# Altium PCB driver_control.PcbDoc
Units mm, origin at the board's own origin, x right, y up, seen from the top; angles counter-clockwise.
Board outline 95 x 62.6 mm, 2 copper layers (Top Layer, Bottom Layer); 60 components, 55 nets, 275 pads, 163 vias.
Unrouted connection lines stored in the file: 8.
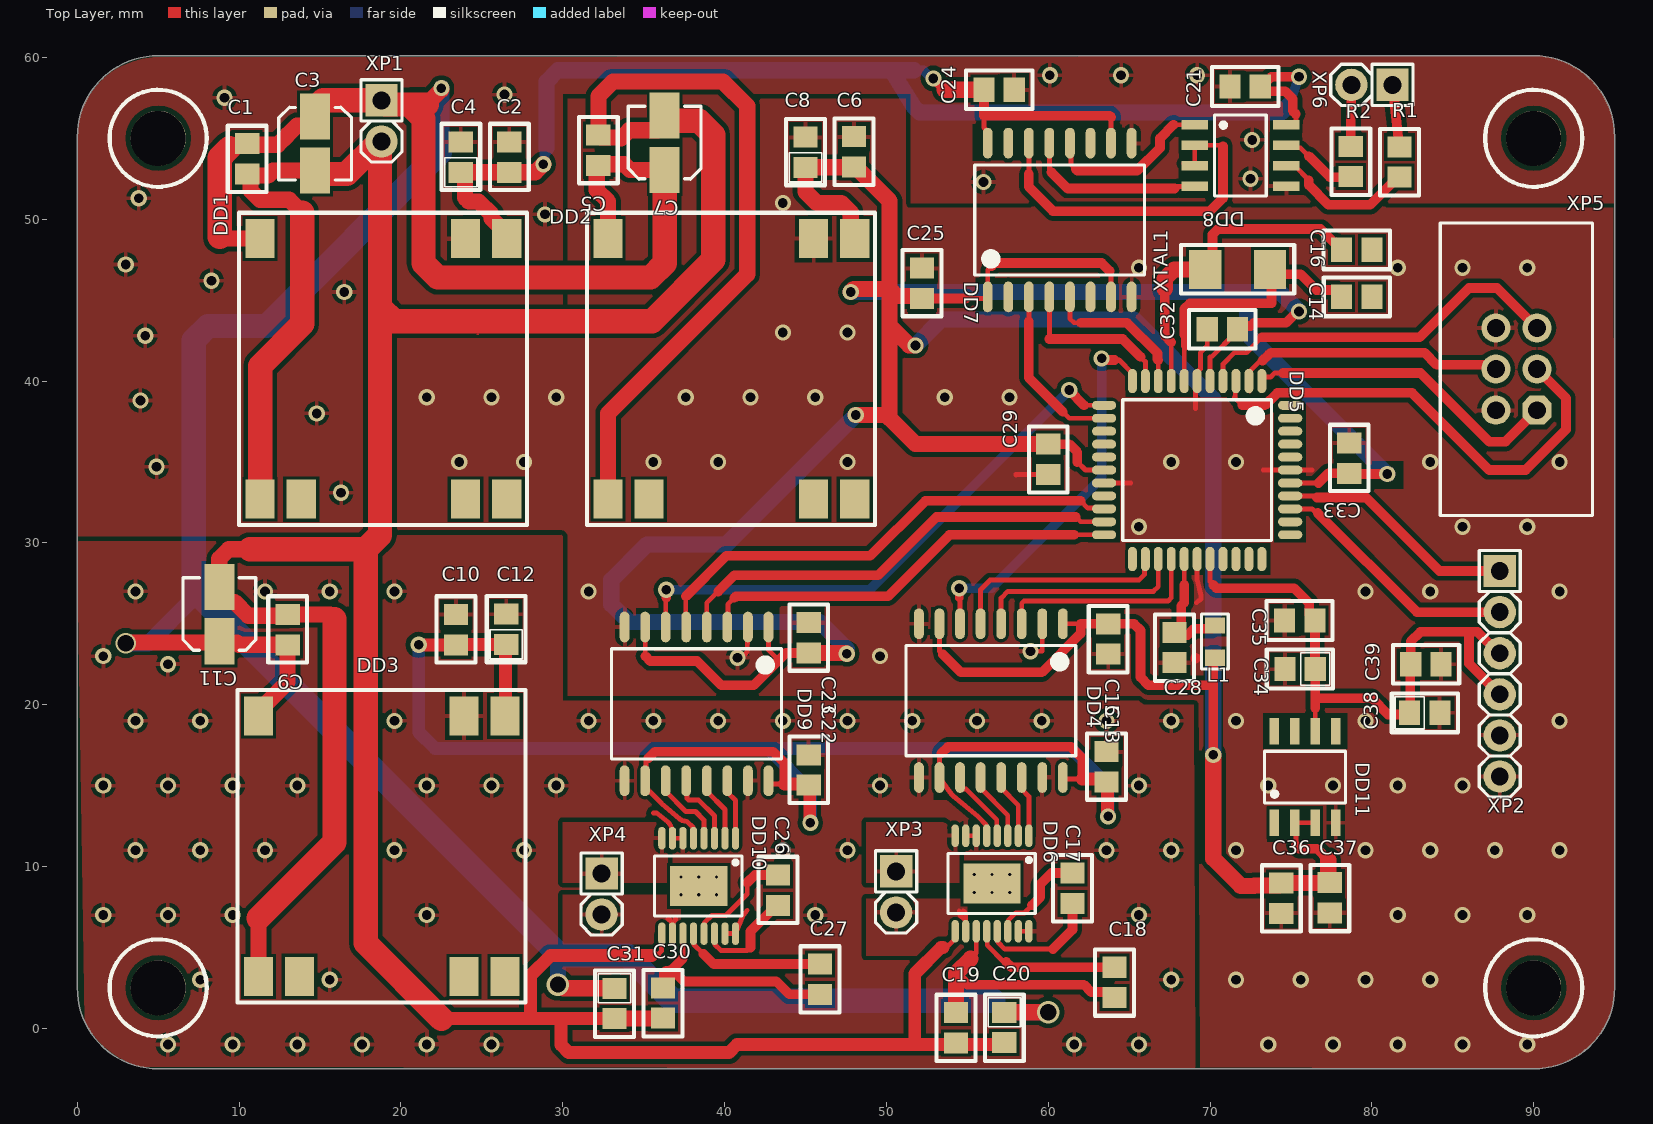
[diagram p0: Top Layer view]
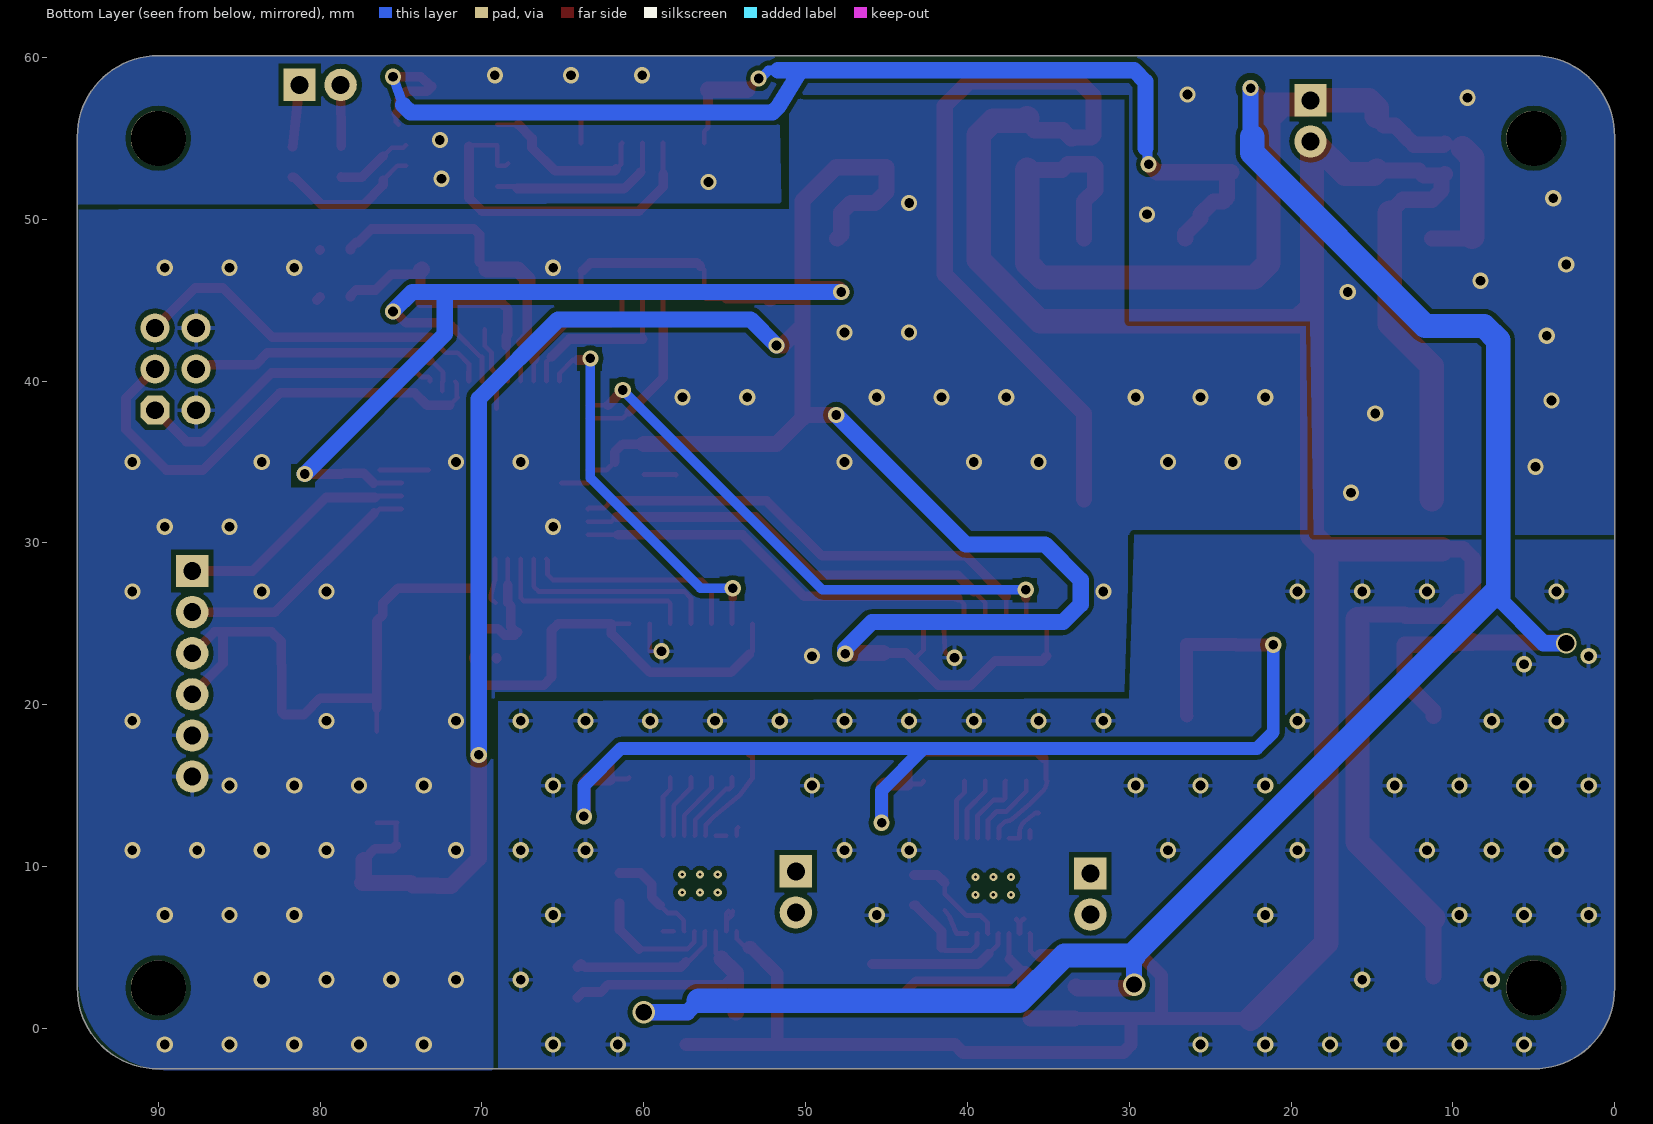
[diagram p1: Bottom Layer view, seen from below]

## Layer stack, top to bottom
Top Solder: solder mask 0.0102, Solder Resist, Dk 3.5
Top Layer: signal copper 0.0356
Dielectric 1: dielectric 0.32, FR-4, Dk 4.8
Bottom Layer: signal copper 0.0356
Bottom Solder: solder mask 0.0102, Solder Resist, Dk 3.5

## Board outline
0,2.5 0,55.1 cw(c5,55.1) 5,60.1 4.9,60.1 89.9,60.1 90,60.1 cw(c90,55.1) 95,55.1 95,2.4 95,2.5 cw(c90,2.5) 90,-2.5 90.1,-2.5 5,-2.5 cw(c5,2.5)

## Design rules (kind name [scope] priority, off if disabled: settings)
Clearance [All] p1: gap=0.3 ignorepadtopadclearanceinfootprint=FALSE except(0.2: Arc-SMDPad Track-SMDPad SMDPad-SMDPad SMDPad-THPad SMDPad-Via SMDPad-Fill SMDPad-Poly SMDPad-Region SMDPad-Text SMDPad-Hole)
HoleSize [All] p1: absolutevalues=TRUE maxlimit=5 minlimit=0.5 maxpercent=80.000 minpercent=20.000
HoleToHoleClearance [All] p1: gap=0.3 allowstackedmicrovias=TRUE
PolygonConnect [All] p1: connectstyle=Relief reliefconductorwidth=0.254 reliefentries=4 polygonreliefangle="90 Angle" airgapwidth=0.254
RoutingVias [All] p1: holewidth=0.6 width=1 viastyle="Through Hole" minholewidth=0.6 minwidth=1 maxholewidth=0.6 maxwidth=1
ShortCircuit [All] p1: allowed=TRUE
SilkToSilkClearance [All] p1: silktosilkclearance=0.2
SilkToSolderMaskClearance [IsPad] p1: minsilkscreentomaskgap=0.2 clearancetoexposedcopper=TRUE
SolderMaskExpansion [All] p1: expansion=0.102 istentingtop=FALSE
Width [All] p1: maxlimit=4 minlimit=0.2 preferedwidth=0.3
25 further rules are at their usual default settings.

## Components (designator, comment, footprint, x,y, rotation, side; value= is the part's Value field where it differs from the comment)
C1 "0.1мкФ" Capacitor_0805 10.5,54.675 r270 top
C2 "0.1мкФ" Capacitor_0805 26.7,52.9 r90 top
C3 "100мкФ" CAPAE4643X46M 14.7,56.35 r270 top
C4 "10мкФ" Capacitor_tant_0805 23.7,52.9 r90 top
C5 "0.1мкФ" Capacitor_0805 32.2,53.325 r90 top
C6 "0.1мкФ" Capacitor_0805 48,53.225 r90 top
C7 "100мкФ" CAPAE4643X46M 36.3,53.05 r90 top
C8 "10мкФ" Capacitor_tant_0805 45,53.2 r90 top
C9 "0.1мкФ" Capacitor_0805 13,23.7 r90 top
C10 "0.1мкФ" Capacitor_0805 23.4,23.7 r90 top
C11 "100мкФ" CAPAE4643X46M 8.783,23.92 r90 top
C12 "10мкФ" Capacitor_tant_0805 26.5,23.725 r90 top
C13 "0.1мкФ" Capacitor_0805 63.6,15.225 r90 top
C14 "22пкФ" Capacitor_0805 78.125,45.2 r0 top
C15 "0.1мкФ" Capacitor_0805 63.7,25 r270 top
C16 "22пкФ" Capacitor_0805 78.118,48.11 r0 top
C17 "22пкФ" Capacitor_0805 61.5,9.6 r270 top
C18 "0.1мкФ" Capacitor_0805 64.1,3.775 r270 top
C19 "0.1мкФ" Capacitor_0805 54.3,0.975 r270 top
C20 "1мкФ" Capacitor_tant_0805 57.288,0.987 r270 top
C21 "0.1мкФ" Capacitor_0805 71.225,58.2 r0 top
C22 "0.1мкФ" Capacitor_0805 45.2,15.025 r90 top
C23 "0.1мкФ" Capacitor_0805 45.2,23.2 r90 top
C24 "0.1мкФ" Capacitor_0805 56.025,58 r0 top
C25 "0.1мкФ" Capacitor_0805 52.2,45.1 r90 top
C26 "22пкФ" Capacitor_0805 43.3,7.6 r90 top
C27 "0.1мкФ" Capacitor_0805 45.9,3.975 r270 top
C28 "0.1мкФ" Capacitor_0805 67.8,24.475 r270 top
C29 "0.1мкФ" Capacitor_0805 60,36.1 r270 top
C30 "0.1мкФ" Capacitor_0805 36.2,2.5 r270 top
C31 "1мкФ" Capacitor_tant_0805 33.2,2.475 r270 top
C32 "0.1мкФ" Capacitor_0805 71.7,43.2 r180 top
C33 "0.1мкФ" Capacitor_0805 78.6,34.3 r90 top
C34 "1мкФ" Capacitor_tant_0805 76.5,22.2 r180 top
C35 "0.1мкФ" Capacitor_0805 76.475,25.2 r180 top
C36 "10мкФ" Capacitor_0805 74.4,8.975 r270 top
C37 "0.1мкФ" Capacitor_0805 77.4,9 r270 top
C38 "1мкФ" Capacitor_tant_0805 82.325,19.5 r0 top
C39 "0.1мкФ" Capacitor_0805 82.4,22.5 r0 top
DD1 "TMR-1-2411SM" TMR1SM_SMD 11.3,32.7 r270 top
DD2 "TDR-2-2411SM" TMR1SM_SMD 32.8,32.7 r270 top
DD3 "TMR-1-2411SM" TMR1SM_SMD 11.2,3.2 r270 top
DD4 "ADuM1401" ADUM_SOIC 60.9,25 r270 top
DD5 "ATMEGA16-8UA" ATMEGA16-44A 73.2,40 r270 top
DD6 "DRV8874" DRV8874_TSOP127P600-8N 58.8,11.9 r270 top
DD7 "ADuM1301" ADUM_SOIC 56.26,45.2 r90 top
DD8 "ADM485" "SOIC_N8 (REF198, ADM485)" 69.05,55.84 r0 top
DD9 "ADuM1401" ADUM_SOIC 42.71,24.8 r270 top
DD10 "DRV8874" DRV8874_TSOP127P600-8N 40.675,11.75 r270 top
DD11 "REF198" "SOIC_N8 (REF198, ADM485)" 73.96,12.7 r90 top
L1 "Fixed inductor, 10мкГн, ±20%, 0805, 100mA, -55...+125°C" "IND: 0805" 70.3,23.9 r90 top value=10мкГн
R1 "120 Ом" resistor_0805 81.7,54.475 r270 top
R2 "120 Ом" resistor_0805 78.7,54.5 r270 top
XP1 "PLS-2" "CON: PLS-2" 18.796,56.074 r270 top
XP2 "Connector, 6pin, 2.54mm, 500VAC, 3A" "CON: PLS-6" 87.9,21.91 r270 top
XP3 "PLS-2" "CON: PLS-2" 50.6,8.43 r270 top
XP4 "PLS-2" "CON: PLS-2" 32.4,8.3 r270 top
XP5 "Connector, 6pin, 2.54mm, 500VAC, 3A" "CON: IDC-6MS" 88.93,40.74 r90 top
XP6 "PLS-2" "CON: PLS-2" 80,58.3 r180 top
XTAL1 "8Мгц" Z_0503 69.7,46.9 r0 top

## Footprints (in the part's own frame and the unit in brackets; to place one, negate y for a bottom-side part, rotate by r counter-clockwise, add the part's x,y. Pads: shape width x height; smd on the part's side, far side on the other; paste and mask are expansions set on the pad)
ADUM_SOIC [mm]
  oval 1.9x0.6 smd: 1(0,0) 2(0,-1.27) 3(0,-2.54) 4(0,-3.81) 5(0,-5.08) 6(0,-6.35) 7(0,-7.62) 8(0,-8.89) 9(9.5,-8.89) 10(9.5,-7.62) 11(9.5,-6.35) 12(9.5,-5.08) 13(9.5,-3.81) 14(9.5,-2.54) 15(9.5,-1.27) 16(9.5,0)
  silkscreen extent 1.35,-9.69 8.15,0.8
ATMEGA16-44A [mm]
  oval 1.5x0.55 smd: 1(0,0) 2(0,-0.8) 3(0,-1.6) 4(0,-2.4) 5(0,-3.2) 6(0,-4) 7(0,-4.8) 8(0,-5.6) 9(0,-6.4) 10(0,-7.2) 11(0,-8) 23(11,-8) 24(11,-7.2) 25(11,-6.4) 26(11,-5.6) 27(11,-4.8) 28(11,-4) 29(11,-3.2) 30(11,-2.4) 31(11,-1.6) 32(11,-0.8) 33(11,0)
  oval 0.55x1.5 smd: 12(1.5,-9.75) 13(2.3,-9.75) 14(3.1,-9.75) 15(3.9,-9.75) 16(4.7,-9.75) 17(5.5,-9.75) 18(6.3,-9.75) 19(7.1,-9.75) 20(7.9,-9.75) 21(8.7,-9.75) 22(9.5,-9.75) 34(9.5,1.75) 35(8.7,1.75) 36(7.9,1.75) 37(7.1,1.75) 38(6.3,1.75) 39(5.5,1.75) 40(4.7,1.75) 41(3.9,1.75) 42(3.1,1.75) 43(2.3,1.75) 44(1.5,1.75)
  silkscreen extent 1.15,-8.6 9.85,0.6, body extent 1.15,-8.6 9.85,0.6, height 1.2
Capacitor_0805 [mm]
  rect 1.3x1.5 smd: 1(0,0) 2(1.875,0)
  silkscreen extent -1.1,-1.2 3,1.2
Capacitor_tant_0805 [mm]
  rect 1.3x1.5 smd: 1(0,0) 2(1.875,0)
  silkscreen extent -1.1,-1.2 3,1.2
CAPAE4643X46M [mm] "Aluminum Electrolytic Capacitor, Body 4,30x4,30x4,60mm, IPC Low Density"
  rect 2.85x1.85 smd: 1(0,0) 2(3.35,0)
  silkscreen extent -0.57,-2.25 3.93,2.25
"CON: IDC-6MS" [mm] "IDC-6MS 6 pin PCB-mount connector"
  oct 1.8x1.8 hole 1.1: 1(-2.54,-1.27)
  round 1.8 hole 1.1: 2(-2.54,1.27) 3(0,-1.27) 4(0,1.27) 5(2.54,-1.27) 6(2.54,1.27)
  round 0.5 on Top Overlay: ""(-9.6,-4.5)
  round 0.5 on Mech1: ""(-8.4,-4)
  silkscreen extent -9.05,-4.7 9.03,4.7, body extent -8.89,-4.55 8.87,4.55, height 9
"CON: PLS-2" [mm]
  rect 2x2 hole 1.1: 1(-1.27,0)
  round 2 hole 1.1: 2(1.27,0)
  silkscreen extent -2.54,-1.27 2.54,1.27, body extent -2.57,-1.28 2.51,1.26, height 8.54
"CON: PLS-6" [mm]
  rect 2x2 hole 1.1: 1(-6.35,0)
  round 2 hole 1.1: 2(-3.81,0) 3(-1.27,0) 4(1.27,0) 5(3.81,0) 6(6.35,0)
  silkscreen extent -7.62,-1.27 7.62,1.27, body extent -7.62,-1.27 7.62,1.27, height 8.54
DRV8874_TSOP127P600-8N [mm]
  oval 1.4x0.45 smd: 1(0,0) 2(0,-0.65) 3(0,-1.3) 4(0,-1.95) 5(0,-2.6) 6(0,-3.25) 7(0,-3.9) 8(0,-4.55) 9(5.9,-4.55) 10(5.9,-3.9) 11(5.9,-3.25) 12(5.9,-2.6) 13(5.9,-1.95) 14(5.9,-1.3) 15(5.9,-0.65) 16(5.9,0)
  rect 2.46x3.55 smd: 17(2.95,-2.275)
  silkscreen extent 1.1,-5 4.8,0.4
"IND: 0805" [mm]
  rect 1x1.25 smd: 1(-1,0) 2(1,0)
  silkscreen extent -1.7,-0.82 1.7,0.82, body extent -1,-0.62 1,0.63, height 0.85
resistor_0805 [mm] "ЧИП-резистор типоразмера 0805"
  rect 1.3x1.5 smd: 0(0,0) 1(1.875,0)
  silkscreen extent -1.1,-1.2 3,1.2
"SOIC_N8 (REF198, ADM485)" [mm] "SOIC, 8-Leads, Body 4,90x3,90mm, Pitch 1,27mm, IPC Medium Density"
  rect 1.65x0.6 smd: 1(0,0) 2(0,-1.27) 3(0,-2.54) 4(0,-3.81) 5(5.65,-3.81) 6(5.65,-2.54) 7(5.65,-1.27) 8(5.65,0)
  silkscreen extent 1.22,-4.41 4.43,0.6
TMR1SM_SMD [mm]
  rect 2.4x1.8 smd: 1(0,0) 2(0,2.54) 6(0,12.7) 7(0,15.24) 8(-16.1,15.24) 9(-16.1,12.7) 14(-16.1,0)
  silkscreen extent -17.7,-1.3 1.6,16.5
Z_0503 [mm]
  rect 2x2.4 smd: 1(0,0) 2(4,0)
  silkscreen extent -1.5,-1.5 5.5,1.5

## Part data
C1 C2 C5 C6 C9 C10 C13 C14 C15 C16 C17 C18 C19 C21 C22 C23 C24 C25 C26 C27 C28 C29 C30 C32 C33 C35 C36 C37 C39: library part Capacity_0805
C3 C7 C11: library part Capacity_electrolity_polar_0805, "electrolity capacitor", link=https://www.digikey.com/en/products/detail/taiyo-yuden/JMK212BJ106KD-T/930656
C4 C8 C12 C20 C31 C34 C38: library part Capacity_tantal_0805, "tanral capacitor"
DD5: library part ATMEGA16-44A
L1: library part Inductor_0805, Manufacturer="Murata Electronics", MaxCurrent=100mA, Package=0805, PartNumber=LQM21FN100M70L, Temperature=-55...+125°C, Tolerance=±20%, TypeInductor="Fixed inductor", HelpURL=https://www.digikey.com/product-detail/en/murata-electronics-north-america/LQM21FN100M70L/490-4029-1-ND/1016289, ValueManufacturerPartNumber="Fixed inductor, 10мкГн, ±20%, 0805, 100mA, -55...+125°C"
R1 R2: library part Resistor_0805
XP1 XP6: "https://www.chipdip.ru/product/wf-2r"
XP2: library part PLS-6, CurrentMax=3A, Manufacturer=Connfly, VoltageMax=500VAC, CommentText=PLS-6, HelpURL=https://www.chipdip.ru/product/pls-6, Multichannel=6pin, PartNumber=PLS-6, Pitch=2.54mm, TypeConnector=Connector, ValueManufacturerPartNumber="Connector, 6pin, 2.54mm, 500VAC, 3A"
XP3 XP4: library part PLS-2-1
XP5: library part IDC-6, CurrentMax=3A, Manufacturer=Connfly, PartNumber=PLS-6, VoltageMax=500VAC, CommentText="\"Разъем\"", HelpURL=https://www.chipdip.ru/product/pls-6, Multichannel=6pin, Pitch=2.54mm, TypeConnector=Connector, ValueManufacturerPartNumber="Connector, 6pin, 2.54mm, 500VAC, 3A"
XTAL1: library part resonstor

## Free pads (board coordinates)
  round 3.4 hole 3.4 unplated: 5(5,55) 5(5,2.5) 5(90,2.5) 5(90,55)

## Via types
v1: diameter 1, hole 0.6, Top Layer to Bottom Layer, 148 vias
v2: diameter 0.5, hole 0.2, Top Layer to Bottom Layer, 12 vias
v3: diameter 1.4, hole 1, Top Layer to Bottom Layer, 2 vias
v4: diameter 1.27, hole 1, Top Layer to Bottom Layer, 1 vias

## Nets (pads, with @x,y where several pads share a name; then routed paths per layer and width w, separated by ;. In a path a pad name is that pad's centre, name@x,y a point inside that pad or via, vN(x,y) a via of type N, cw(c..) or ccw(c..) an arc to the next point about the centre after c; other vN are vias at no path point)
+5B: C6.1 C8.1 C15.1 C23.1 C25.1 C29.1 C32.1 C33.1 C36.1 C37.1 DD2.8 DD4.1 DD4.7 DD5.5 DD5.17 DD5.38 DD7.1 DD7.7 DD9.1 DD9.7 DD11.2 DD11.3 L1.1 | length 273
  Top Layer w0.3: DD9.7 35.1,24.79 35.1,23 ; DD9.1 42.71,23.39 43.35,22.75 ; DD4.7 53.28,23.32 53.5,23.1 ; 54.9,45.1 56.16,45.1 DD7.1 56.26,46.86 56.5,47.1 ; DD4.1 62,25 ; 61.8,35 62.3,34.5 DD5.17 ; 63.8,46.8 63.88,46.72 DD7.7 ; DD5.5 70,41.5 70.1,41.5 71.6,43 C32.1@71.6,43.3 ; DD5.38 76.7,33.7 ; 75.3,11.3 75.3,12.63 DD11.2 DD11.3
  Top Layer w0.6: 35.1,23 35.4,22.7 38.3,22.7 39.8,21.2 41.8,21.2 43.35,22.75 43.8,23.2 C23.1 ; C25.1 54.9,45.1 ; 53.5,23.1 54.6,22 59.6,22 62,24.4 62,25 C15.1 65.3,25 65.7,24.6 65.7,21.7 66.2,21.2 70.2,21.2 ; 56.5,47.1 56.7,47.3 63.3,47.3 63.8,46.8 ; C29.1 61.3,36.1 61.8,35.6 61.8,35 ; v1(70.2,16.9) 70.2,21.2 ; L1.1@70.2,22.9 70.2,21.2 ; C32.1 71.9,43.4 72.5,43.4 72.7,43.6 74.692,43.6 75.392,44.3 v1(75.5,44.3) ; 75.3,11.3 75.5,11.1 76.6,11.1 77.3,10.4 ; 76.7,33.7 77.3,34.3 C33.1 ; C33.1@78.65,34.25 v1(80.95,34.25)
  Top Layer w1: C23.1 47.5,23.2 v1(47.55,23.15) ; v1(47.8,45.5) 47.986,45.686 50.2,45.686 ; DD2.8 47.8,49.04 47.8,50.414 47.214,51 45.7,51 45,51.7 C8.1 45.012,53.212 47.987,53.212 C6.1 48.1,53.225 50.2,51.125 50.2,45.686 ; v1(48.1,37.9) 50,37.9 50.2,37.7 ; v1(51.8,42.2) 51.4,42.2 50.2,43.4 ; C25.1 52.05,45.25 50.636,45.25 50.2,45.686 ; C29.1 51.8,36.1 50.2,37.7 ; v1(70.2,16.9) 70.2,10.5 71.9,8.8 72.728,8.8 72.753,8.825 74.25,8.825 C36.1 74.413,8.988 77.388,8.988 C37.1 77.3,9.1 77.3,10.4 ; L1.1@70.2,22.9 L1.1 ; 50.2,37.7 50.2,43.4 ; 50.2,43.4 50.2,45.686
  Bottom Layer w1: v1(47.55,23.15) 47.55,23.45 45.9,25.1 34.1,25.1 33,26.2 33,27.7 35.2,29.9 40.1,29.9 v1(48.1,37.9) ; v1(47.8,45.5) 72.3,45.5 ; v1(51.8,42.2) 53.4,43.8 65.3,43.8 70.2,38.9 v1(70.2,16.9) ; v1(75.5,44.3) 74.3,45.5 72.3,45.5 ; v1(80.95,34.25) 72.3,42.9 72.3,45.5
+5B_DRV: C10.1 C12.1 C13.1 C22.1 DD3.8 DD4.10 DD4.16 DD6.5 DD9.10 DD9.16 DD10.5 | length 110.1
  Top Layer w0.3: 35.3,16.7 35.147,16.547 35.147,15.357 DD9.10 ccw(c36.032,15.3) 35.366,14.634 36.1,13.9 37.22,12.944 ccw(c37.61,13.4) 37.61,12.8 37.663,12.8 38.046,12.417 38.046,11.779 DD10.5 ; DD9.16 42.71,15.239 42.849,15.1 43.7,15.1 ; 53.4,17 53.28,16.88 DD4.10 ccw(c53.381,15.5) 53.31,15.429 cw(c53.097,15.217) 53.339,15.394 54.027,14.463 ccw(c54.55,14.85) 54.135,14.35 55.635,13.103 56.171,12.567 56.171,11.929 DD6.5 ; DD4.16 61,15.4 62.1,15.4
  Top Layer w0.6: 35.3,16.7 35.7,17.1 43,17.1 43.7,16.4 43.7,15.1 ; 53.4,17 53.8,17.4 61.4,17.4 62.1,16.7 62.1,15.4
  Top Layer w0.8: v1(21.1,23.7) C10.1 23.413,23.713 26.452,23.713 26.47,23.695 26.47,19.33 DD3.8 ; 43.7,15.1 45.125,15.1 C22.1 45.262,14.963 45.262,12.738 v1(45.3,12.7) ; 62.1,15.4 63.425,15.4 C13.1 63.662,15.163 63.662,13.136 v1(63.7,13.097)
  Bottom Layer w0.8: v1(21.1,23.7) 21.1,18.3 22.1,17.3 42.7,17.3 ; v1(45.3,12.7) 45.3,14.7 42.7,17.3 ; v1(63.7,13.097) 63.7,15 61.4,17.3 42.7,17.3
+5B_RS: C2.1 C4.1 C21.2 C24.1 DD1.8 DD7.10 DD7.16 DD8.8 | length 91.6
  Top Layer w0.3: 56.025,56.4 56.025,55.666 56.26,55.431 DD7.16 ; DD7.10 63.88,56.28 63.9,56.3 ; DD8.8@75.15,55.84 75.3,55.99 75.3,56.5
  Top Layer w0.6: v1@53.008,58.7 v1(52.9,58.7) 53.6,58 ; C24.1 56.025,56.4 63.8,56.4 63.9,56.3 ; 75.3,56.5 75.1,56.7 75.1,57.449 74.65,57.899 73.401,57.899 C21.2 73.8,58.8 v1(75.5,58.8)
  Top Layer w1: C4.1 C2.1 28.3,52.9 v1(28.8,53.4) ; C4.1@23.8,52.9 23.95,52.75 23.95,51.336 24.186,51.1 24.79,51.1 25.6,50.29 25.6,50.04 26.54,49.1 DD1.8 ; 53.6,58 C24.1
  Bottom Layer w0.6: v1(28.8,53.4) 28.877,53.477 28.877,54.277 29,54.4 ; 51.7,59.2 52.292,59.2 52.792,58.7 v1(52.9,58.7) ; 74.864,57.05 v1(75.5,58.8)
  Bottom Layer w1: 29,54.4 29,58.5 29.7,59.2 50.3,59.2 ; 51.7,59.2 50.3,59.2 ; 74.864,57.05 74.414,56.6 52.045,56.6 51.669,56.976 51.607,57.076 50.3,59.2
+5В: C14.2 C16.2 | length 0.3
  Top Layer w0.6: C16.2 C16.2@80.003,48.1 ; C14.2 C14.2@80.2,45
+27B: C1.1 C3.1 C5.1 C7.1 C9.1 C11.1 C18.2 C19.1 C20.1 C27.2 C30.1 C31.1 DD1.14 DD2.14 DD3.14 DD6.11 DD10.11 XP1.1 | length 224.9
  Top Layer w0.3: 37.4,4.3 37.425,4.325 DD10.11 ; 55.2,4.3 55.55,4.65 DD6.11
  Top Layer w0.6: 36.45,3.35 36.75,3.65 ; 37.4,4.3 36.75,3.65 ; C27.2 44,2.1 43.2,2.9 37.5,2.9 36.75,3.65 ; 54.3,3.4 55,2.7 62.2,2.7 62.65,2.25 63.75,2.25 C18.2
  Top Layer w1: v4(3,23.8) 3.052,23.852 8.714,23.852 C11.1 ; C11.1@8.783,23.823 9.877,23.823 10,23.7 C9.1 13,21.4 11.2,19.6 DD3.14 ; 8.8,48.9 8.9,48.8 DD1.14 ; 9.4,54.4 9.55,54.55 ; C1.1 10.575,54.6 12.4,54.6 13,55.2 13,55.214 13.586,55.8 14.275,55.8 14.7,56.225 C3.1 ; 21.594,57.094 v1@22.5,58 ; v3(29.7,2.7) 29.808,2.7 30.033,2.475 C31.1 ; DD2.14 32.8,51.1 32.1,51.8 32.1,53.225 C5.1 32.275,53.4 33.8,53.4 34.15,53.05 C7.1 ; C31.1@33.287,2.587 C31.1@33.3,2.575 ; C30.1 36.3,2.5 36.45,2.65 36.45,3.35 ; C19.1@54.3,1 C19.1@54.312,0.988 ; C19.1@54.3,1.4 54.3,3.4 55.2,4.3 ; C20.1 57.294,0.994 59.994,0.994 v3(60,1)
  Top Layer w1.5: 8.8,48.9 8.8,53.8 9.4,54.4 ; C3.1 14.7,56.85 15.194,57.344 XP1.1 19.046,57.094 20.521,57.094 ; 21.594,57.094 20.521,57.094 ; C7.1 36.3,47.279 35.421,46.4 22.279,46.4 21.4,47.279 21.4,56.216 20.521,57.094
  Bottom Layer w1: v4(3,23.8) 4.4,23.8 7.2,26.6 7.2,26.7 ; 22.4,55.1 22.5,55.2 v1(22.5,58.1) ; v3(29.7,2.7) 29.7,4.5 ; 56.6,1.7 57.3,1 v3(60,1)
  Bottom Layer w1.5: 7.2,26.7 7.2,27.1 ; 22.4,55.1 22.4,54.1 11.7,43.4 8.079,43.4 7.2,42.521 7.2,27.1 ; 56.6,1.7 36.8,1.7 34,4.5 29.7,4.5 29.7,4.6 7.2,27.1
AREF: C34.1 C35.1 C38.1 C39.1 DD5.29 DD11.6 XP2.3 XP2.4 | length 37.8
  Top Layer w0.3: DD5.29 70,27.6 70.2,27.4 ; DD11.6 76.5,19.8
  Top Layer w0.6: 70.2,27.4 70.4,27.2 75.2,27.2 76.125,26.275 76.125,25.55 C35.1 76.487,25.187 76.487,22.213 C34.1 76.5,20.4 ; 76.5,19.8 76.5,20.4 ; XP2.4 86,22.54 86,24.5 ; XP2.3 87.853,23.18 86.533,24.5 86,24.5 ; 76.5,20.4 80,20.4 81,19.4 82.225,19.4 C38.1 82.362,19.537 82.362,22.463 C39.1 82.4,23.9 83,24.5 86,24.5
DRV11: DD5.22 DD9.3 | length 26.4
  Top Layer w0.3: DD9.3 40.2,24.83 40.2,26.2 40.6,26.6 ; 61.6,30.5 DD5.22
  Top Layer w0.6: 40.6,26.6 40.7,26.7 50.1,26.7 53.9,30.5 61.6,30.5
DRV12: DD5.21 DD9.4 | length 28.4
  Top Layer w0.3: DD9.4 38.9,26.3 39.6,27 ; 61.7,31.6 62,31.3 DD5.21
  Top Layer w0.6: 39.6,27 40.6,28 49.5,28 53.1,31.6 61.7,31.6
DRV13: DD5.20 DD9.5 | length 30.4
  Top Layer w0.3: 37.6,26.7 37.6,24.83 DD9.5 ; 62,32.6 62.452,32.148 63.402,32.148 DD5.20
  Top Layer w0.6: 37.6,26.7 40.1,29.2 49,29.2 52.4,32.6 62,32.6
DRV14: DD5.12 DD9.6 | length 34.9
  Top Layer w0.3: DD9.6 36.36,26.56 v1@36.4,26.6 ; 62.213,38.5 DD5.12
  Top Layer w0.6: v1@36.4,26.6 v1(36.4,27.1) ; v1(61.3,39.45) 61.3,39.413 62.213,38.5
  Bottom Layer w0.6: v1(36.4,27.1) 48.95,27.1 v1(61.3,39.45)
DRV21: DD4.3 DD5.26 | length 13.6
  Top Layer w0.3: DD4.3 58.36,26.26 58.5,26.4 67.4,26.4 67.6,26.6 DD5.26 DD5.26@67.6,28.457
DRV22: DD4.4 DD5.25 | length 13.3
  Top Layer w0.3: DD4.4 57.09,26.59 57.5,27 66.5,27 66.8,27.3 DD5.25
DRV23: DD4.5 DD5.24 | length 13.6
  Top Layer w0.3: DD4.5 55.82,27.12 56.4,27.7 65.6,27.7 65.952,28.052 65.952,28.952 DD5.24
DRV24: DD4.6 DD5.11 | length 24
  Top Layer w0.3: 54.5,26.6 54.55,26.55 DD4.6 ; 64.1,41.3 64.375,41.3 65.2,40.475 DD5.11
  Top Layer w0.5: 54.5,26.6 v1(54.5,27.2)
  Top Layer w0.6: v1@63.3,41.3 64.1,41.3
  Bottom Layer w0.6: v1(54.5,27.2) 56.5,27.2 63.3,34 v1(63.3,41.4)
ENB: DD5.13 DD7.3 | length 10.7
  Top Layer w0.3: 58.8,43.7 DD7.3 ; 60.9,38.1 61.3,37.7 DD5.13
  Top Layer w0.6: 58.8,43.7 58.8,40.2 60.9,38.1
GND: C1.2 C3.2 C5.2 C7.2 C9.2 C11.2 C19.2 C20.2 C30.2 C31.2 DD1.1 DD2.1 DD3.1 DD6.9 DD10.9 XP1.2 | length 275.7
  Top Layer w0.3: 35.5,4.5 35.824,4.5 36.096,4.772 36.096,5.821 DD10.9 ; 53.5,5 53.725,5 54.25,5.525 DD6.9
  Top Layer w0.6: C30.2@36.1,0.625 C30.2
  Top Layer w0.8: 22.5,0.6 28,0.6 ; C31.2 29.9,0.6 ; 35.5,4.5 29.25,4.5 28,3.25 28,0.6 ; 53.5,5 53.375,5 51.75,3.375 51.75,-1 ; C20.2@57.4,-1 54.3,-1 51.75,-1 ; 28,0.6 29.9,0.6 ; 29.9,0.6 29.9,-1.031 30.369,-1.5 40.272,-1.5 40.772,-1 51.75,-1
  Top Layer w1: C1.2 10.6,52.7 C1.2@10.65,52.7 ; 10.679,29.6 9.363,29.6 8.777,29.014 8.777,27.276 C11.2 8.783,26.77 9.208,26.345 9.723,26.345 10.568,25.5 12.925,25.5 C9.2 15.625,25.575 15.9,25.3 ; DD3.1 11.2,6.8 ; 13.9,50.4 13.1,51.2 11.286,51.2 10.7,51.786 10.7,52.65 C1.2@10.65,52.7 ; C3.2 12.1,53 11.8,52.7 C1.2@10.65,52.7 ; DD2.1 32.8,38 41.4,46.6 41.4,57 39.9,58.5 33.1,58.5 32.2,57.6 C5.2 32.35,55.05 33.45,55.05 33.5,55 33.6,55 34.1,55.5 35.875,55.5 36.3,55.925 36.3,56.254 C7.2 ; C31.2@33.387,0.613 36.087,0.613 C30.2@36.1,0.625
  Top Layer w1.5: 10.679,29.6 17.821,29.6 ; 11.2,6.8 15.9,11.5 15.9,25.3 ; DD1.1 11.3,40.932 13.9,43.532 13.9,50.4 ; C3.2 14.7,52.975 14.875,52.8 16.656,52.8 18.66,54.804 XP1.2 18.7,54.709 18.7,44.579 ; 22.5,0.6 17.821,5.279 17.821,29.6 ; C7.2@36.3,56.254 36.475,56.079 38.421,56.079 39.3,55.2 39.3,47.489 35.511,43.7 19.579,43.7 18.7,44.579 ; 17.821,29.6 18.7,30.479 18.7,44.579
MISO: DD5.2 XP5.4 | length 17.4
  Top Layer w0.3: DD5.2@72.448,39.393 72.448,39.952 DD5.2 72.4,40.543 72.575,40.718 72.575,40.734 73.103,41.261 73.239,41.261 ; XP5.4@87.5,41 87.66,40.84 XP5.4
  Top Layer w0.6: 73.239,41.261 73.627,41.65 73.65,41.65 73.75,41.75 83.25,41.75 84,41 87.075,41 87.106,40.97 87.47,40.97 XP5.4@87.5,41
MOSI: DD5.1 XP5.1 | length 19.9
  Top Layer w0.3: DD5.1 73.2,40.135 73.315,40.25 73.75,40.25 74,40.5 74.5,40.5
  Top Layer w0.6: 74.5,40.5 82,40.5 82.001,40.499 82.499,40.499 82.501,40.501 82.999,40.501 87.25,36.25 88.25,36.25 XP5.1
NetC17_1: C17.1 DD6.14 | length 6.3
  Top Layer w0.3: DD6.14 57.529,6.029 57.529,6.667 57.995,7.133 58.533,7.133 59,7.6
  Top Layer w0.6: 59,7.6 59.5,8.1 59.5,8.9 60.2,9.6 C17.1
NetC17_2: C17.2 DD6.13 | length 7.6
  Top Layer w0.3: DD6.13 56.879,5.971 56.879,5.333 57.312,4.9 60.3,4.9
  Top Layer w0.6: 60.3,4.9 61.5,6.1 C17.2
NetC18_1: C18.1 DD6.12 | length 9.5
  Top Layer w0.3: DD6.12 56.229,5.971 56.229,5.135 57.263,4.1 57.4,4.1
  Top Layer w0.6: 57.4,4.1 57.725,3.775 63.65,3.775 63.875,4 C18.1
NetC26_1: C26.1 DD10.14 | length 6.5
  Top Layer w0.3: DD10.14 39.404,5.821 39.404,5.183 39.787,4.8 41.4,4.8 41.6,5
  Top Layer w0.6: 41.6,5 41.6,6 43.2,7.6 C26.1
NetC26_2: C26.2 DD10.13 | length 6.9
  Top Layer w0.3: DD10.13 38.754,5.879 38.754,6.517 39.208,6.971 40.071,6.971 41.4,8.3 41.4,9
  Top Layer w0.6: 41.4,9 41.875,9.475 C26.2
NetC27_1: C27.1 DD10.12 | length 9
  Top Layer w0.3: DD10.12 38.104,5.821 38.104,5.183 38.687,4.6 38.7,4.6
  Top Layer w0.6: 38.7,4.6 39.325,3.975 C27.1
NetC28_1: C28.1 DD5.27 L1.2 | length 7.6
  Top Layer w0.3: 68.4,27.4 DD5.27
  Top Layer w0.6: 68.4,27.4 68.4,26.8 68.403,26.797 68.403,26.3 68.225,26.122 68.225,24.825 67.875,24.475 C28.1 67.975,24.3 68.6,24.3 69,24.7 70.1,24.7 L1.2
NetDD4_11: DD4.11 DD6.4 | length 4.7
  Top Layer w0.3: DD4.11 54.55,14.931 54.689,14.793 54.907,14.793 56.821,12.879 56.821,11.929 DD6.4
NetDD4_12: DD4.12 DD6.3 | length 4.3
  Top Layer w0.3: DD4.12 55.82,14.85 57.5,13.17 DD6.3
NetDD4_13: DD4.13 DD6.2 | length 4
  Top Layer w0.3: DD4.13 57.09,14.85 58.15,13.79 DD6.2
NetDD4_14: DD4.14 DD6.1 | length 3.8
  Top Layer w0.3: DD4.14 58.36,14.769 58.8,14.329 DD6.1
NetDD6_8: DD6.8 XP3.1 | length 0.5
  Top Layer w0.3: DD6.8@54.181,12.404 54.25,12.334 DD6.8
NetDD6_10: DD6.10 XP3.2 | length 2.7
  Top Layer w0.3: 54.5,7.25 54.5,7.139 54.59,7.049 ; 54.539,6.999 54.871,6.667 54.871,6.029 DD6.10 54.9,7.1 54.75,7.25
NetDD7_12: DD7.12 DD8.1 | length 10.7
  Top Layer w0.3: DD7.12 61.397,54.643 61.397,53.403 61.7,53.1 ; 67.74,55.84 DD8.1
  Top Layer w0.6: 61.7,53.1 61.8,53 65.5,53 66.9,54.4 66.9,55 67.74,55.84
NetDD7_13: DD7.13 DD8.4 | length 11.2
  Top Layer w0.3: DD7.13 60.07,53.03 60.2,52.9 ; 67.8,51.9 67.93,52.03 DD8.4
  Top Layer w0.6: 60.2,52.9 61.2,51.9 67.8,51.9
NetDD7_14: DD7.14 DD8.2 DD8.3 | length 22.6
  Top Layer w0.3: 58.8,52.8 DD7.14 ; DD8.3@68.375,53.45 68.525,53.3 DD8.3 DD8.2 70.73,54.57 70.8,54.5
  Top Layer w0.6: 58.8,52.8 58.8,52 60.3,50.5 70,50.5 70.8,51.3 70.8,54.5
NetDD8_6: DD8.6 R1.1 | length 8.9
  Top Layer w0.3: DD8.6 75.225,53.3 76.1,52.425 76.1,52.4
  Top Layer w0.6: 76.1,52.4 76.1,52.1 77.3,50.9 79.9,50.9 81.6,52.6 R1.1
NetDD8_7: DD8.7 R2.1 | length 4.8
  Top Layer w0.3: DD8.7 74.85,54.42 75.58,54.42 76.104,53.896
  Top Layer w0.6: 76.104,53.896 77.401,52.599 78.674,52.599 R2.1
NetDD9_11: DD9.11 DD10.4 | length 4.9
  Top Layer w0.3: DD9.11 36.36,14.65 37.61,13.4 38.2,13.4 38.725,12.875 DD10.4
NetDD9_12: DD9.12 DD10.3 | length 4.6
  Top Layer w0.3: DD9.12 37.687,15.243 37.687,14.188 37.776,14.1 38.4,14.1 39.375,13.125 DD10.3
NetDD9_13: DD9.13 DD10.2 | length 4
  Top Layer w0.3: DD9.13 38.9,14.65 40.025,13.525 DD10.2
NetDD9_14: DD9.14 DD10.1 | length 3.8
  Top Layer w0.3: DD9.14 40.17,14.599 40.675,14.094 DD10.1
NetDD10_8: DD10.8 XP4.1 | length 0.5
  Top Layer w0.3: DD10.8 DD10.8@36.125,12.225
NetDD10_10: DD10.10 XP4.2 | length 2
  Top Layer w0.3: 36.511,6.752 36.538,6.726 36.571,6.726 36.746,6.55 36.746,5.879 DD10.10 36.804,5.879 36.804,6.517 36.962,6.675 36.962,6.776
NetR1_0: R1.0 XP6.1 | length 3.8
  Top Layer w0.6: XP6.1 R1.0
NetR2_0: R2.0 XP6.2 | length 3.8
  Top Layer w0.6: R2.0 XP6.2
POT1: DD5.37 XP2.1 | length 14.9
  Top Layer w0.3: DD5.37 76.512,32.9 76.612,32.8
  Top Layer w0.6: 76.612,32.8 79.636,32.8 84.176,28.26 XP2.1
POT2: DD5.36 XP2.2 | length 15.6
  Top Layer w0.3: DD5.36 76.3,32.1 76.5,31.9 76.6,31.9 76.652,31.848
  Top Layer w0.6: 76.652,31.848 82.78,25.72 XP2.2
RST: DD5.4 XP5.5 | length 24
  Top Layer w0.3: DD5.4@70.848,40.607 70.848,40.048 DD5.4 70.8,40.607 70.8,41.05 71.5,41.75 72.25,41.75 73.2,42.7
  Top Layer w0.6: 73.2,42.7 82.95,42.7 86,45.75 87.73,45.75 XP5.5
RXD: DD5.9 DD7.5 | length 9.4
  Top Layer w0.3: DD7.5 61.34,43.86 61.6,43.6 62,43.6 ; DD5.9 66.8,41.3
  Top Layer w0.6: 62,43.6 64.873,43.6 66.75,41.723 66.75,41.35 66.8,41.3
SCK: DD5.3 XP5.3 | length 29.5
  Top Layer w0.3: DD5.3@71.648,39.952 71.552,39.856 71.552,39.052 71.5,39 72,38.5
  Top Layer w0.6: 72,38.5 73.379,38.5 74.154,39.275 82.475,39.275 87.25,34.5 89.5,34.5 92,37 92,38.94 XP5.3
TXD: DD5.10 DD7.4 | length 10.3
  Top Layer w0.3: 60.07,42.6 DD7.4 ; 65.7,41.5 66,41.2 DD5.10
  Top Layer w0.6: 60.07,42.6 64.6,42.6 65.7,41.5
XT1: C14.1 DD5.7 XTAL1.2 | length 17.3
  Top Layer w0.3: DD5.7 68.4,42.1 68.5,42.2
  Top Layer w0.6: 68.5,42.2 68.5,42.773 68.4,42.873 68.4,44.449 68.751,44.8 73.8,44.8 73.8,46.8 74,46.6 75.6,46.6 76.575,45.625 77.775,45.625 78.125,45.275 C14.1
  Top Layer w1: XTAL1.2 XTAL1.2@73.8,46.8
XT2: C16.1 DD5.8 XTAL1.1 | length 20.3
  Top Layer w0.3: DD5.8 67.6,42.4
  Top Layer w0.6: 67.2,45.7 67.2,42.8 67.6,42.4 ; XTAL1.1 70.149,47.349 70.149,49.049 70.5,49.4 76.828,49.4 77.668,48.56 77.768,48.56 78.118,48.21 C16.1
  Top Layer w1: 67.2,45.7 67.2,46.314 67.786,46.9 XTAL1.1
Общ: C6.2 C8.2 C15.2 C23.2 C25.2 C28.2 C29.2 C32.2 C33.2 C34.2 C35.2 C36.2 C37.2 C38.2 C39.2 DD2.9 DD4.2 DD4.8 DD5.6 DD5.18 DD5.28 DD5.39 DD7.2 DD7.8 DD9.2 DD9.8 DD11.4 XP2.5 XP2.6 XP5.2 XP5.6 | length 19.7
  Top Layer w0.3: v1(40.8,22.9) 41.282,23.141 41.402,23.26 41.405,23.38 DD9.2 ; 58,34.2 58,34.225 C29.2 ; v1(58.9,23.3) 59.63,23.3 DD4.2 ; DD5.18 65.1,33.7 ; 69.1,38.3 69.1,40 DD5.6 69.2,40.543 69.4,40.743 69.4,41.251 69.4,41.749 69.825,42.174 C32.2 ; 69.153,26.3 69.316,26.424 69.446,26.554 69.446,26.716 69.437,26.751 69.2,27.7 DD5.28 ; 73.3,34.5 DD5.39 76.3,34.5
  Top Layer w0.6: C23.2@45.15,25.125 C23.2 ; 69.1,22.85 69.1,22.9 ; 78.6,34.3 78.65,34.25
  other v1: 73.6,-1 77.6,-1 81.6,-1 85.6,-1 89.6,-1 71.6,3 75.6,3 79.6,3 83.6,3 81.6,7 85.6,7 89.6,7 71.6,11 79.6,11 83.6,11 87.6,11 91.6,11 73.6,15 77.6,15 81.6,15 85.6,15 71.6,19 79.6,19 91.6,19 49.6,23 31.6,27 79.6,27 83.6,27 91.6,27 65.6,31 85.6,31 89.6,31 23.6,35 27.6,35 35.6,35 39.6,35 47.6,35 67.6,35 71.6,35 83.6,35 91.6,35 21.6,39 25.6,39 29.6,39 37.6,39 41.6,39 45.6,39 53.6,39 57.6,39 43.6,43 47.6,43 65.6,47 81.6,47 85.6,47 89.6,47 43.6,51
Общ_DRV: C10.2 C12.2 C13.2 C22.2 DD3.9 DD4.9 DD4.15 DD6.6 DD6.7 DD6.15 DD6.16 DD9.9 DD9.15 DD10.6 DD10.7 DD10.15 DD10.16 | length 6.4
  Top Layer w0.3: 35.6,13.3 35.8,13.3 35.882,13.236 36.5,12.75 cw(c35.836,12.086) 36.775,12.086 DD10.7 DD10.6 ; DD10.15 DD10.16 41.085,6.864 41.1,6.9 41.4,7.3 ; DD6.7 DD6.6 ; DD6.15 DD6.16
  other v1: 5.6,-1 9.6,-1 13.6,-1 17.6,-1 21.6,-1 25.6,-1 61.6,-1 65.6,-1 7.6,3 15.6,3 67.6,3 1.6,7 5.6,7 9.6,7 21.6,7 45.6,7 65.6,7 3.6,11 7.6,11 11.6,11 19.6,11 27.6,11 43.6,11 47.6,11 63.6,11 67.6,11 1.6,15 5.6,15 9.6,15 13.6,15 21.6,15 25.6,15 29.6,15 49.6,15 65.6,15 3.6,19 7.6,19 19.6,19 31.6,19 35.6,19 39.6,19 43.6,19 47.6,19 51.6,19 55.6,19 59.6,19 63.6,19 67.6,19 5.6,22.5 1.6,23 3.6,27 11.6,27 15.6,27 19.6,27
Общ_RS: C2.2 C4.2 C21.1 C24.2 DD1.9 DD7.9 DD7.15 DD8.5
  other v1: 16.3,33.1 4.9,34.7 14.8,38 3.9,38.8 4.2,42.8 16.5,45.5 8.3,46.2 3,47.2 28.9,50.3 3.8,51.3 56,52.3 72.5,52.5 72.6,54.9 9.1,57.5 26.4,57.7 60.1,58.9 64.5,58.9 69.2,58.9
pads on no net: DD1.2 DD1.6 DD1.7 DD2.2 DD2.6 DD2.7 DD3.2 DD3.6 DD3.7 DD5.14 DD5.15 DD5.16 DD5.19 DD5.23 DD5.30 DD5.31 DD5.32 DD5.33 DD5.34 DD5.35 DD5.40 DD5.41 DD5.42 DD5.43 DD5.44 DD6.17 DD7.6 DD7.11 DD10.17 DD11.1 DD11.5 DD11.7 DD11.8 XP5.
copper on no net:
  other v2: 37.3,8.25 38.4,8.25 39.5,8.25 55.425,8.4 56.525,8.4 57.625,8.4 37.3,9.35 38.4,9.35 39.5,9.35 55.425,9.5 56.525,9.5 57.625,9.5

## Polygon pours and split planes (outlines as drawn)
Общ on Top Layer "Общ_L01_P015" (solid, pour order 15): 19.4,30.5 30,30.5 30,20.25 68.739,20.25 69.09,19.9 69.09,-2.41 89.9,-2.5 ccw(c89.95,2.55) 95,2.5 94.9,51 51.3,51 51.3,57.75 30,57.75 30,42.9 19.4,42.9
no net on Top Layer "NONET_L01_P016" (solid, pour order 16): 24.7,42.9 24.8,42.9
Общ_DRV on Top Layer "Общ_DRV_L01_P011" (solid, pour order 11): 0,30.4 30,30.5 30,20.25 69,20.25 69.09,-2.5 3.905,-2.379 cw(c5.553,3.182) 0.452,0.424
Общ_RS on Top Layer "Общ_RS" (solid, pour order 8): 0,54.5 0,30.4 19.161,30.4 19,43.6 30,43.501 30,57.75 51.5,57.75 51.5,51 95,51 95,54.884 ccw(c90.033,55.099) 95.005,55.099 ccw(c89.999,55.099) 90.214,60.1 5,60 ccw(c5,55) 0,55
NetDD10_8 on Top Layer "NETDD10_8_L01_P004" (solid, remove dead copper, pour order 4): 36.5,12.75 36.5,9 30,9 30,12.75
NetDD6_8 on Top Layer "NETDD6_8_L01_P002" (solid, remove dead copper, pour order 2): 48.75,9 54.5,9 54.5,12.75 48.75,12.75
NetDD10_10 on Top Layer "NETDD10_10_L01_P003" (solid, remove dead copper, pour order 3): 30,8.25 37.3,8.25 37.3,4.8 37.25,4.75 37,5 30,5
NetDD6_10 on Top Layer "NETDD6_10_L01_P001" (solid, remove dead copper, pour order 1): 48.75,8 48.75,4.5 55,4.5 55,8
no net on Top Layer "NONET_L01_P000" (solid, pour order 0): 48,8.4
Общ on Bottom Layer "Общ_L02_P017" (solid, pour order 17): 19,43.6 19,30.5 30.1,30.5 30.1,20.8 69.2,20.8 69.2,-2.6 89.3,-2.6 ccw(c89.3,3) 94.9,3 94.9,50.6 51,50.6 51,57.7 30,57.7 30,43.7 18.8,43.7
Общ_DRV on Bottom Layer "Общ_DRV_L02_P014" (solid, pour order 14): 0,30.5 29.7,30.5 30,20.4 69,20.2 69,-2.5 5,-2.5 cw(c5,2.5) 0,2.5
no net on Bottom Layer "NONET_L02_P012" (solid, pour order 12): 0,30.5 0,55.1 cw(c5,55.1) 5,60.1 89.5,60.1 cw(c89.95,55.05) 95,55.5 95,50.9 51.5,51 51.607,57.076 50.5,57.7 30,57.7 30,43.7 18.8,43.7 18.6,30.5

## Other copper
Top Layer:
  pour cut-out: 52.821,16.834 cw(c52.631,16.644) 52.9,16.644 52.9,14.1 59.1,14.1 59.1,16.8
  pour cut-out: 34.5,26 34.5,23.5 43.4,23.5 43.4,26
  pour cut-out: 46.886,47.346 49.194,47.346 49.194,50.2 46.886,50.2
  pour cut-out: 79.981,33.319 81.981,33.319 81.981,35.069 79.981,35.069
  pour cut-out: 44.181,22.319 46.181,22.319 46.181,24.069 44.181,24.069
  pour cut-out: 52.742,26.049 53.679,26.049 53.739,24.039 52.683,24.039
  pour cut-out: 68.072,56.34 68.034,51.335 70.21,51.273 70.313,56.339
  pour cut-out: 73.675,56.34 75.696,56.368 75.7,52.5 73.623,52.453
  pour cut-out: 55.5,44.1 55.501,46.401 64.339,46.377 64.306,44.1
  pour cut-out: 55.3,53.595 55.3,55.911 64.339,55.877 64.558,55.868 64.624,53.612
  pour cut-out: 57.988,55.661
  pour cut-out: 73.95,39.05 75.95,39.05 75.95,30 73.95,30
  pour cut-out: 62.45,38.75 64.45,38.75 64.45,30 62.45,30
  pour cut-out: 73.5,41 73.5,39 64.75,39 64.75,41
  pour cut-out: 73.75,30 73.75,28 64.75,28 64.75,30
  pour cut-out: 73.25,19.5 73.25,17.25 78.5,17.25 78.5,19.5
  pour cut-out: 76,15
  pour cut-out: 73.5,13.75 77,13.75 77,11.5 73.5,11.5
  pour cut-out: 69.5,23.625 69.5,22.25 71.25,22.25 71.25,23.625
  pour cut-out: 53.081,44.081 53.081,46.081 51.331,46.081 51.331,44.081
  pour cut-out: 70.781,42.381 70.781,44.381 69.031,44.381 69.031,42.381
  pour cut-out: 77.606,33.394 79.606,33.394 79.606,35.144 77.606,35.144
  pour cut-out: 58.981,33.344 60.981,33.344 60.981,35.094 58.981,35.094
  pour cut-out: 62.681,24.119 64.681,24.119 64.681,25.869 62.681,25.869
  pour cut-out: 81.5,23.5 81.5,21.5 83.25,21.5 83.25,23.5
  pour cut-out: 74.5,50.75
  pour cut-out: 30.25,41.75
Bottom Layer:
  pour cut-out: 53.8,27.9 55.307,27.9 55.307,26.421 53.8,26.421
  pour cut-out: 35.7,27.8 37.207,27.8 37.207,26.321 35.7,26.321
  pour cut-out: 80.3,34.9 81.807,34.9 81.807,33.421 80.3,33.421
  pour cut-out: 62.6,42.1 64.107,42.1 64.107,40.621 62.6,40.621
  pour cut-out: 60.6,40.15 62.107,40.15 62.107,38.671 60.6,38.671

## Silkscreen, mask and mechanical layers (free items; w line width, h text height)
Top Overlay:
  circle w0.254: c90,2.5 r3
  circle w0.254: c90,55 r3
  circle w0.254: c5,2.5 r3
  circle w0.254: c5,55 r3
Mechanical 1:
  lines w0.254: 4.9,60.1 89.9,60.1 ; 5,-2.5 cw(c5,2.5) 0,2.5 0,55.1 cw(c5,55.1) 5,60.1 ; 5.1,-2.5 90.1,-2.5 ; 90,-2.5 ccw(c90,2.5) 95,2.5 ; 90,60.1 cw(c90,55.1) 95,55.1 95,2.4